# Altium PCB PCB1.PcbDoc
Units mm, origin at the board's own origin, x right, y up, seen from the top; angles counter-clockwise.
Board outline 152.4 x 101.6 mm, 2 copper layers (Top Layer, Bottom Layer); 64 components, 27 nets, 160 pads, 0 vias.
Unrouted connection lines stored in the file: 100.
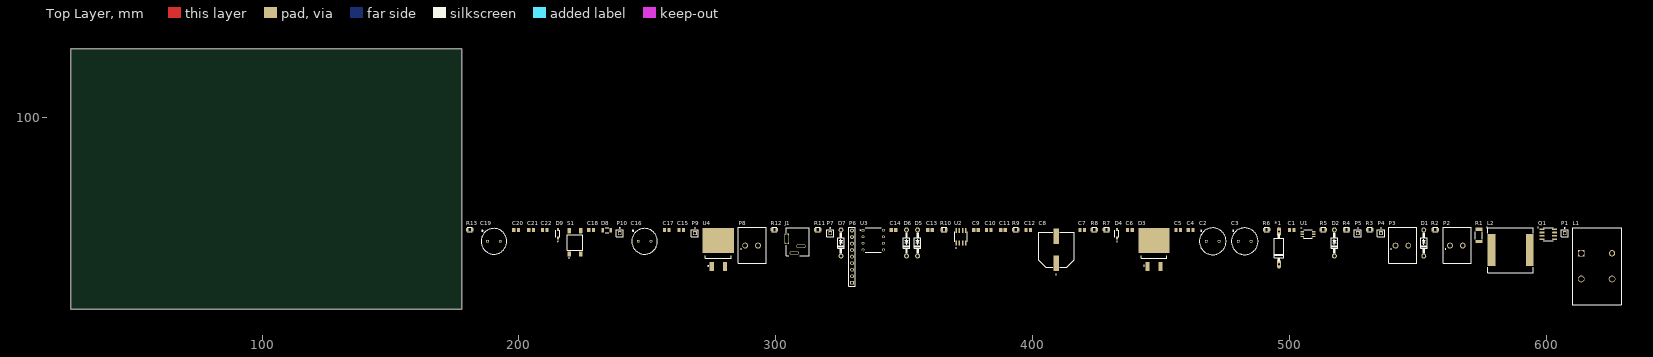
[diagram p0: Top Layer view]
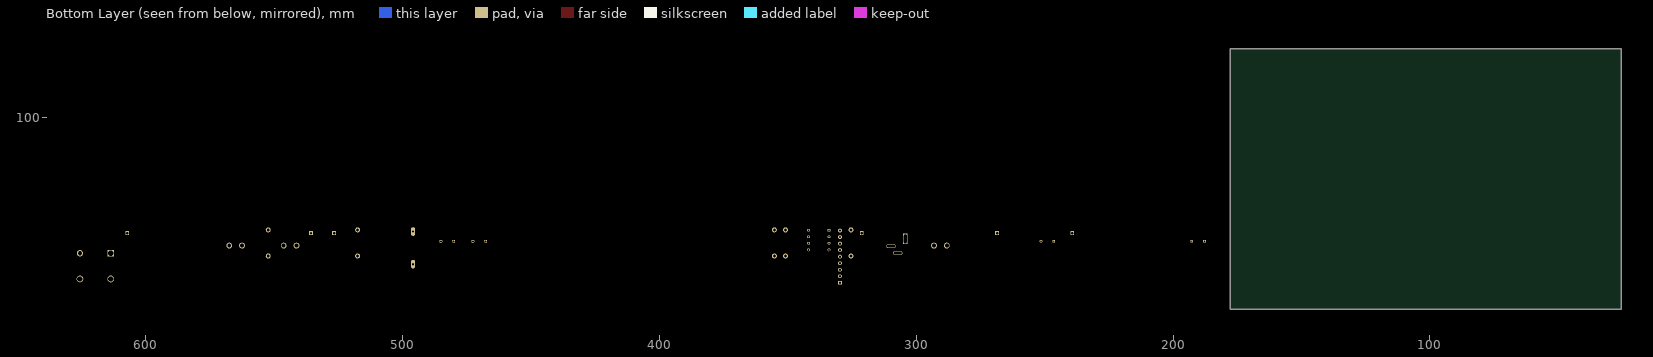
[diagram p1: Bottom Layer view, seen from below]

## Layer stack, top to bottom
Top Solder: solder mask 0.0102, Solder Resist, Dk 3.5
Top Layer: signal copper 0.0356
Dielectric 1: dielectric 0.32, FR-4, Dk 4.8
Bottom Layer: signal copper 0.0356
Bottom Solder: solder mask 0.0102, Solder Resist, Dk 3.5

## Board outline
25.4,25.4 177.8,25.4 177.8,127 25.4,127

## Design rules (kind name [scope] priority, off if disabled: settings)
Clearance [All] p1: gap=0.125 ignorepadtopadclearanceinfootprint=FALSE except(0: Arc-Hole Track-Hole SMDPad-Hole THPad-Hole Via-Hole Fill-Hole Poly-Hole Region-Hole Text-Hole)
DiffPairsRouting [All] p1: maxlimit=10 minlimit=0.125 mostfreqgap=0.15 toplayer_minwidth=0.381 toplayer_maxwidth=0.381 toplayer_prefwidth=0.381 bottomlayer_minwidth=0.381 bottomlayer_maxwidth=0.381 bottomlayer_prefwidth=0.381 maxuncoupledlength=12.7
FabricationTestPointUsage FabricationTestPointUsage_1 [All] p1: valid=0 allowmultiple=FALSE
FabricationTestpoint FabricationTestpoint_1 [All] p1: side=3 testpointundercomponent=TRUE minsize=1.016 maxsize=2.54 preferedsize=1.524 minholesize=0 maxholesize=1.016 preferedholesize=0.813 testpointgrid=0.025 allowsidetop=TRUE allowsidebottom=TRUE usegrid=TRUE gridtolerance=0
HoleSize [All] p1: absolutevalues=TRUE maxlimit=6 minlimit=0.2 maxpercent=80.000 minpercent=20.000
HoleSize FabricationTestpoint [All] p2 off: absolutevalues=TRUE maxlimit=2.54 minlimit=0.025 maxpercent=80.000 minpercent=20.000
HoleSize FabricationTestPointUsage [All] p3 off: absolutevalues=TRUE maxlimit=2.54 minlimit=0.025 maxpercent=80.000 minpercent=20.000
PlaneClearance [All] p1: clearance=0.5
PlaneConnect [All] p1: planeconnectstyle=Relief reliefexpansion=0.4 reliefentries=4 reliefconductorwidth=0.15 reliefairgap=0.15
PolygonConnect [All] p1: connectstyle=Relief reliefconductorwidth=0.15 reliefentries=4 polygonreliefangle="90 Angle" airgapwidth=0.254
RoutingCorners [All] p1: cornerstyle=45-Degree minsetback=1.25 maxsetback=1.25
RoutingVias [All] p1: holewidth=0.3 width=0.6 viastyle="Through Hole" minholewidth=0.2 minwidth=0.45 maxholewidth=0.45 maxwidth=0.75
SolderMaskExpansion [All] p1: expansion=0.075 istentingtop=FALSE
Width [All] p1: maxlimit=10 minlimit=0.125 preferedwidth=0.15
23 further rules are at their usual default settings.

## Components (designator, comment, footprint, x,y, rotation, side; value= is the part's Value field where it differs from the comment)
*1 "Diode-DO15" DO15 496.062,49.276 r90 top
C1 "Cap" C0805 500.888,56.388 r0 top value=100n
C2 "2 x UDB1H4RMPM1TD" C1-C2 470.027,51.943 r0 top value=4.7u
C3 "2 x UDB1H4RMPM1TD" C1-C2 482.473,51.943 r0 top value=4.7u
C4 "Cap" C0805 461.518,56.388 r0 top value=100n
C5 "Cap" C0805 456.692,56.388 r0 top value=100n
C6 "Cap" C0805 437.896,56.388 r0 top value=100n
C7 "Cap" C0805 419.354,56.388 r0 top value=330n
C8 "EEVFK1K101Q" C_Pol_EEV-FK1K101Q 409.067,48.641 r90 top value=100u
C9 "Cap" C0805 377.952,56.388 r0 top value=100n
C10 "Cap" C0805 382.905,56.388 r0 top value=100n
C11 "Cap" C0805 388.493,56.388 r0 top value=2n7
C12 "Cap" C0805 398.272,56.388 r0 top value=2n7
C13 "Cap" C0805 360.045,56.388 r0 top value=2n7
C14 "Cap" C0805 345.821,56.388 r0 top value=100n
C15 "Cap" C0805 263.144,56.388 r0 top value=100n
C16 "Cap Pol2" C_ECA2CHG100 248.793,52.07 r0 top value=10u
C17 "1u" C0805 257.556,56.388 r0 top
C18 "Cap" C0805 228.092,56.388 r0 top value=100n
C19 "Cap Pol2" C_ECA2CHG100 190.119,52.07 r0 top value=10u
C20 "Cap" C0805 198.882,56.388 r0 top value=1n
C21 "Cap" C0805 204.724,56.388 r0 top value=100n
C22 "Cap" C0805 210.058,56.388 r0 top value=100n
D1 "Diode 1N4004" diode_1N4004 552.323,51.308 r90 top
D2 "Diode 1N4004" diode_1N4004 517.525,51.308 r90 top
D3 "STPS30L60C" Diode_Scho 447.294,51.435 r90 top
D4 "BZX584C15G3-08" diode_zener 432.689,54.864 r90 top
D5 "Diode 1N4004" diode_1N4004 355.219,51.308 r90 top
D6 "Diode 1N4004" diode_1N4004 350.901,51.308 r90 top
D7 "Diode 1N4004" diode_1N4004 325.374,51.308 r90 top
D8 "KPTL-3216SURCK-01" LED 234.188,56.261 r0 top
D9 "BZX584C15G3-08" diode_zener 215.011,54.864 r90 top
J1 "PJ-006A" CUI_Inc_PJ-006A_MFG 308.61,51.816 r0 top
L1 "EMI_Choke" EMI_Choke 619.633,42.291 r0 top
L2 "SRP1770TA-220M" SRP1770TA-220M 586.105,48.641 r0 top value=22uH
P1 "Plug" PIN1 607.187,55.118 r0 top
P2 "Block_2Position" Block_2Position 565.15,50.419 r0 top
P3 "Block_2Position" Block_2Position 543.941,50.419 r0 top
P4 "Plug" PIN1 535.686,55.118 r0 top
P5 "Plug" PIN1 526.669,55.118 r0 top
P6 "Header 9" HDR1X9 329.692,35.814 r90 top
P7 "Plug" PIN1 321.183,55.118 r0 top
P8 "Block_2Position" Block_2Position 290.703,50.419 r0 top
P9 "Plug" PIN1 268.478,55.118 r0 top
P10 "Plug" PIN1 239.268,55.118 r0 top
Q1 "SIR120DP-T1-RE3" MOFET_SIR120DP-T1-RE3 600.583,54.864 r0 top
R1 "WSL20106L000FEA18" R0.006 573.786,54.229 r90 top value=0.006
R2 "Res1" R0805 556.768,56.515 r0 top value=1k
R3 "Res1" R0805 531.241,56.515 r0 top value=100k
R4 "Res1" R0805 522.224,56.515 r0 top value=100k
R5 "Res1" R0805 513.207,56.515 r0 top value=100k
R6 "Res1" R0805 491.109,56.515 r0 top value=10
R7 "Res1" R0805 428.752,56.515 r0 top value=100k
R8 "Res1" R0805 424.053,56.515 r0 top value=6k2
R9 "Res1" R0805 393.446,56.515 r0 top value=5k1
R10 "Res1" R0805 365.506,56.515 r0 top value=6k2
R11 "Res1" R0805 316.357,56.515 r0 top value=100k
R12 "Res1" R0805 299.466,56.515 r0 top value=1k
R13 "Res1" R0805 180.848,56.515 r0 top value=1k
S1 "4-1437565-1" Switch 221.615,51.435 r90 top
U1 "LTC6101AIMS8PBF" LTC6101AIMS8#PBF 507.111,55.118 r0 top
U2 "IR7184STRPBF" IR7184STRPBF 372.11,53.594 r90 top
U3 "LM555CN/NOPB" LM555CN/NOPB 337.947,52.705 r0 top
U4 "L7805CD2T-TR" Volt_Reg 277.622,52.324 r90 top

## Footprints (in the part's own frame and the unit in brackets; to place one, negate y for a bottom-side part, rotate by r counter-clockwise, add the part's x,y. Pads: shape width x height; smd on the part's side, far side on the other; paste and mask are expansions set on the pad)
Block_2Position [mm]
  round 2.25 hole 1.5: 1(-2.627,-0.127) 2(2.373,-0.127)
  silkscreen extent -5.23,-7 5.57,7
C1-C2 [mm]
  round 1.208 hole 0.8: NEG(-2.373,0) POS(2.627,0)
  silkscreen extent -5.07,-5.2 5.33,5.2
C0805 [mm]
  rect 1.24x1.56 smd: 1(-0.885,0) 2(0.885,0)
C_ECA2CHG100 [mm]
  rect 1.108x1.108 hole 0.6: NEG(-2.373,-0.127)
  round 1.108 hole 0.6: POS(2.627,-0.127)
  silkscreen extent -4.87,-5.13 5.13,4.87
C_Pol_EEV-FK1K101Q [mm]
  rect 6.06x2.21 smd: 1(-5.225,-0.127) 2(5.225,-0.127)
  silkscreen extent -9.7,-6.98 6.85,6.73
CUI_Inc_PJ-006A_MFG [mm]
  rect 1.6x4.1 hole 3.5 slot 1 at 0 deg paste-1000 mask+0: 1(-4.35,1.05)
  rrect100% 3.6x1.6 hole 1 slot 3 at 0 deg paste-1000 mask+0: 2(-1.4,-4.45) 3(1.2,-1.75)
  silkscreen extent -4.5,-5.5 4.5,5.5, body extent -5.25,-5.6 4.6,5.6, height 0.25
diode_1N4004 [mil]
  round 76 hole 44: A(200,0) C(-200,0)
  silkscreen extent -155,-50 155,50
Diode_Scho [mm]
  rect 3.5x1.6 smd: 1(-9.367,2.54) 3(-9.367,-2.54)
  rect 9.75x12.2 smd paste-7: 4(0.908,0)
  silkscreen extent -9.14,-5 -5.18,5
diode_zener [mm]
  rrect25% 1.25x0.74 smd: A(1.66,-0.127) C(-1.66,-0.127)
  silkscreen extent -3.01,-0.9 1.35,0.65
DO15 [mil]
  oval 132x66 hole 35.43: A(255,5) C(-245,5)
  silkscreen extent -201,-65 210,75
EMI_Choke [mm]
  round 2.6 hole 2.1: 1(-6,-5) 2(6,-5)
  round 2.43 hole 1.62: 3(6,5)
  rect 2.6x2.6 hole 2.1: 4(-6,5)
  silkscreen extent -9.53,-15.11 9.65,14.99
HDR1X9 [mm] "Connector; Header; 9 Position"
  rect 1.5x1.5 hole 0.9: 1(0,0)
  round 1.5 hole 0.9: 2(2.54,0) 3(5.08,0) 4(7.62,0) 5(10.16,0) 6(12.7,0) 7(15.24,0) 8(17.78,0) 9(20.32,0)
  silkscreen extent -1.27,-1.27 21.59,1.27
IR7184STRPBF [mm]
  rrect15% 1.97x0.6 smd: 1(-2.348,1.905) 2(-2.348,0.635) 3(-2.348,-0.635) 4(-2.348,-1.905) 5(2.602,-1.905) 6(2.602,-0.635) 7(2.602,0.635) 8(2.602,1.905)
  silkscreen extent -4.27,-2.5 2.13,2.5
LED [mm]
  rect 1.06x1.82 smd: 1(-1.528,0) 2(1.528,0)
  silkscreen extent -0.68,-0.9 0.68,0.9
LM555CN/NOPB [mm]
  rect 1.13x1.13 hole 0.74: 1(-3.97,3.556)
  round 1.13 hole 0.74: 2(-3.97,1.016) 3(-3.97,-1.524) 4(-3.97,-4.064) 5(3.97,-4.064) 6(3.97,-1.524) 7(3.97,1.016) 8(3.97,3.556)
  silkscreen extent -5.13,-5.05 3.17,4.54
LTC6101AIMS8#PBF [mil]
  rect 55x17 smd: 1(-83.25,27.88) 2(-83.25,2.29) 3(-83.25,-23.3) 4(-83.25,-48.89) 5(90.75,-48.89) 6(90.75,-23.3) 7(90.75,2.29) 8(90.75,27.88)
  silkscreen extent -62,-77 70,55, body extent -55,-107 63,86, height 17
MOFET_SIR120DP-T1-RE3 [mm]
  rrect25% 1.9x0.6 smd: 1(-2.201,1.778) 2(-2.201,0.508) 3(-2.201,-0.762) 4(-2.201,-2.032) 5(2.709,-2.032) 6(2.709,-0.762) 7(2.709,0.508) 8(2.709,1.778)
  silkscreen extent -3.85,-2.65 2.2,2.47
PIN1 [mm] "Connector; Plug"
  rect 1.5x1.5 hole 0.9: 1(0,0)
  silkscreen extent -1.4,-1.4 1.4,2.17
R0.006 [mm]
  rect 1.21x2.81 smd: 1(-2.416,0) 2(2.416,0)
  silkscreen extent -1.49,-1.4 1.49,1.4
R0805 [mm]
  rrect25% 1x1.42 smd: 1(-0.935,0) 2(0.935,0)
  silkscreen extent -1,-0.89 1,0.89
SRP1770TA-220M [mm]
  rect 3x12.45 smd: 1(-7.445,-0.127) 2(7.445,-0.127)
  silkscreen extent -9.25,-8.93 8.8,8.72, body extent -8.65,-8.78 8.65,8.52, height 7
Switch [mm]
  rrect15% 2.1x1.38 smd: 1(-4.423,2.113) 2(4.677,2.113) 3(-4.423,-2.367) 4(4.677,-2.367)
  silkscreen extent -6.12,-3.13 3.13,2.87
Volt_Reg [mm]
  rect 3.5x1.6 smd: 1(-10.256,2.54) 3(-10.256,-2.54)
  rect 9.75x12.2 smd paste-7: 4(0.019,0)
  silkscreen extent -10.03,-5 -6.07,5

## Part data
*1: "P6KE43CA", Ref=P6KE43CA, Tension=43V
C1 C4 C5 C6 C9 C10 C14 C15 C18 C21 C22: "Capacitor", LatestRevisionDate=17-Jul-2002, LatestRevisionNote="Re-released for DXP Platform.", PackageDescription="Radial Cap, Thru-Hole; 2 Leads; 0.3 in Pin Spacing", PackageReference=RAD-0.3, Published=8-Jun-2000, Publisher="Altium Limited", Supplier 1=Mouser
C2 C3: library part "Cap Pol2", LatestRevisionDate=17-Jul-2002, LatestRevisionNote="Re-released for DXP Platform.", PackageDescription="Polarized Capacitor; 2 Leads", PackageReference=POLAR0.8, Published=8-Jun-2000, Publisher="Altium Limited", Supplier 1=Digi-Key
C7: library part Cap_2, "Capacitor", LatestRevisionDate=17-Jul-2002, LatestRevisionNote="Re-released for DXP Platform.", PackageDescription="Radial Cap, Thru-Hole; 2 Leads; 0.3 in Pin Spacing", PackageReference=RAD-0.3, Published=8-Jun-2000, Publisher="Altium Limited", Supplier 1=Mouser
C8: library part "Cap Pol2_1", "Polarized Capacitor (Axial)", LatestRevisionDate=17-Jul-2002, LatestRevisionNote="Re-released for DXP Platform.", PackageDescription="Polarized Capacitor; 2 Leads", PackageReference=POLAR0.8, Published=8-Jun-2000, Publisher="Altium Limited", Supplier 1=Mouser
C11 C12 C13: library part Cap_1, "Capacitor", LatestRevisionDate=17-Jul-2002, LatestRevisionNote="Re-released for DXP Platform.", PackageDescription="Radial Cap, Thru-Hole; 2 Leads; 0.3 in Pin Spacing", PackageReference=RAD-0.3, Published=8-Jun-2000, Publisher="Altium Limited", Supplier 1=Mouser
C16 C19: library part "Cap Pol2_2", "Polarized Capacitor (Axial)", LatestRevisionDate=17-Jul-2002, LatestRevisionNote="Re-released for DXP Platform.", PackageDescription="Polarized Capacitor; 2 Leads", PackageReference=POLAR0.8, Published=8-Jun-2000, Publisher="Altium Limited", Supplier 1=Mouser
C17: library part C_4, Valeur=1u
C20: library part Cap_3, "Capacitor", LatestRevisionDate=17-Jul-2002, LatestRevisionNote="Re-released for DXP Platform.", PackageDescription="Radial Cap, Thru-Hole; 2 Leads; 0.3 in Pin Spacing", PackageReference=RAD-0.3, Published=8-Jun-2000, Publisher="Altium Limited", Supplier 1=Mouser
D1 D2 D5 D6 D7: "1 Amp General Purpose Rectifier", Code_JEDEC=DO-204-AL, ComponentLink1Description="Manufacturer Link", ComponentLink1URL=http://www.fairchildsemi.com/, ComponentLink2Description=Datasheet, ComponentLink2URL=http://www.fairchildsemi.com/ds/1N%2F1N4001.pdf, DatasheetVersion=1998, LatestRevisionDate=17-Jul-2002, LatestRevisionNote="Re-released for DXP Platform.", PackageDescription="Diode, Axial; Body 5.2 x 2.7 mm (LxDia. max), Lead Dia. 0.86 mm (max)", PackageReference=DO-41, PackageVersion=Aug-1999, Published=8-Jun-2000, Publisher="Altium Limited", Supplier 1=Digi-Key
D3: library part "D Schottky", "Schottky Diode", Code_JEDEC=DO-214-AA, LatestRevisionDate=17-Jul-2002, LatestRevisionNote="Re-released for DXP Platform.", PackageDescription="DO-214-AA/SMB; 2 C-Bend Leads; Body 5.3 x 3.6 mm, inc. leads (LxW)", PackageReference=SMB, Published=8-Jun-2000, Publisher="Altium Limited"
D4 D9: library part "D Zener", "Zener Diode 15V", LatestRevisionDate=17-Jul-2002, LatestRevisionNote="Re-released for DXP Platform.", PackageDescription="Diode, Thru-Hole; 2 Leads; 0.7 in Pin Spacing", PackageReference=DIODE-0.7, Published=8-Jun-2000, Publisher="Altium Limited", Supplier 1=Mouser
D8: library part LED2, "Typical RED, GREEN, YELLOW, AMBER GaAs LED", LatestRevisionDate=17-Jul-2002, LatestRevisionNote="Re-released for DXP Platform.", PackageDescription="SM LED; 2 Flat Leads", PackageReference=3.2X1.6X1.1, PackageVersion=Feb-2002, Published=8-Jun-2000, Publisher="Altium Limited", Supplier 1=Farnell
J1: "2.1mm DC Power Jack"
L1: "1mH 20A"
P6: "Header, 9-Pin", LatestRevisionDate=17-Jul-2002, LatestRevisionNote="Re-released for DXP Platform.", Publisher="Altium Limited"
R1: library part Res1_2, "Resistor", LatestRevisionDate=17-Jul-2002, LatestRevisionNote="Re-released for DXP Platform.", PackageDescription="Axial Device, Thru-Hole; 2 Leads; 0.3 in Pin Spacing", PackageReference=AXIAL-0.3, Published=8-Jun-2000, Publisher="Altium Limited", Supplier 1=Mouser
R2 R12 R13: library part Res1_6, "Resistor", LatestRevisionDate=17-Jul-2002, LatestRevisionNote="Re-released for DXP Platform.", PackageDescription="Axial Device, Thru-Hole; 2 Leads; 0.3 in Pin Spacing", PackageReference=AXIAL-0.3, Published=8-Jun-2000, Publisher="Altium Limited", Supplier 1=Mouser
R3 R4 R5 R7 R11: "Resistor", LatestRevisionDate=17-Jul-2002, LatestRevisionNote="Re-released for DXP Platform.", PackageDescription="Axial Device, Thru-Hole; 2 Leads; 0.3 in Pin Spacing", PackageReference=AXIAL-0.3, Published=8-Jun-2000, Publisher="Altium Limited", Supplier 1=Digi-Key, Supplier 2=Mouser
R6: library part Res1_5, "Resistor", LatestRevisionDate=17-Jul-2002, LatestRevisionNote="Re-released for DXP Platform.", PackageDescription="Axial Device, Thru-Hole; 2 Leads; 0.3 in Pin Spacing", PackageReference=AXIAL-0.3, Published=8-Jun-2000, Publisher="Altium Limited", Supplier 1=Mouser
R8 R10: library part Res1_1, "Resistor", LatestRevisionDate=17-Jul-2002, LatestRevisionNote="Re-released for DXP Platform.", PackageDescription="Axial Device, Thru-Hole; 2 Leads; 0.3 in Pin Spacing", PackageReference=AXIAL-0.3, Published=8-Jun-2000, Publisher="Altium Limited", Supplier 1=Mouser
R9: library part Res1_4, "Resistor", LatestRevisionDate=17-Jul-2002, LatestRevisionNote="Re-released for DXP Platform.", PackageDescription="Axial Device, Thru-Hole; 2 Leads; 0.3 in Pin Spacing", PackageReference=AXIAL-0.3, Published=8-Jun-2000, Publisher="Altium Limited", Supplier 1=Mouser
S1: library part SW-PB, "Switch", LatestRevisionDate=17-Jul-2002, LatestRevisionNote="Re-released for DXP Platform.", PackageDescription="Switch; 2 Leads", PackageReference=SPST-2, Published=24-Mar-1999, Publisher="Altium Limited", Supplier 1=Mouser
U1: "SP Amp Current Sense Amp Single 60V Automotive 8-Pin MSOP Tube", Package="MSOP-8 Analog Devices", Availability=Warning, Check_prices=https://www.snapeda.com/parts/LTC6101AIMS8%23PBF/Analog%20Devices/view-part/4331140/?ref=eda, MF="Analog Devices", MP=LTC6101AIMS8#PBF, Price=None, Purchase-URL=https://pricing.snapeda.com/search/part/LTC6101AIMS8#PBF/?ref=eda, SnapEDA_Link=https://www.snapeda.com/parts/LTC6101AIMS8%23PBF/Analog%20Devices/view-part/4331140/?ref=snap, Supplier 1=Mouser
U2: "Drives IGBT/MOSFET power devices", Package="SOIC-8 Infineon", Supplier Part Number 1=942-IR7184STRPBF, Availability=Unavailable, MF="Infineon Technologies", MP=IR7184STRPBF, Price=None, SnapEDA_Link=https://www.snapeda.com/parts/IR7184STRPBF/Infineon%20Technologies/view-part/1224754/?ref=snap, Supplier 1=Mouser
U3: Package=None, Availability=Unavailable, MP=LM555CN/NOPB, Price=None, Supplier 1=Mouser
U4: library part "Volt Reg", "Voltage Regulator", LatestRevisionDate=29-May-2009, LatestRevisionNote="IPC-7351 Footprint Added.", PackageDescription="3-Pin Transistor Outline Package 2.54 mm Pitch, 15.1 mm Lead Span", PackageReference=D2PAK, Published=24-Mar-1999, Publisher="Altium Limited", Supplier 1=Mouser
P1 P4 P5 P7 P9 P10: LatestRevisionDate=17-Jul-2002, LatestRevisionNote="Re-released for DXP Platform.", Publisher="Altium Limited"

## Nets (pads, with @x,y where several pads share a name; then routed paths per layer and width w, separated by ;. In a path a pad name is that pad's centre, name@x,y a point inside that pad or via, vN(x,y) a via of type N, cw(c..) or ccw(c..) an arc to the next point about the centre after c; other vN are vias at no path point)
+5V: C15.2 C17.1 P6.1 U4.3
+12V: C1.2 C18.2 P8.2 U2.5 U4.1
BUCK_OUT: *1.C P3.1 P4.1 R1.1 R4.2 U1.8
GND: *1.A C1.1 C4.1 C5.1 C6.1 C8.2 C9.1 C10.1 C11.1 C12.1 C13.1 C15.1 C17.2 C18.1 D3.1 D8.2 J1.2 J1.3 L1.3 P3.2 P6.5 P6.9 P8.1 P9.1 P10.1 R8.1 R9.1 R10.1 R13.2 S1.1 U1.5 U2.2 U2.3
INPUT: C8.1 C9.2 C10.2 L1.4 P1.1 Q1.5 Q1.6 Q1.7 Q1.8 R2.1 R7.2
Iout_mon: C11.2 P6.3 P7.1 R9.2 U1.4
LED: P6.6 R12.1
NetC14_1: C14.1 R11.2 U3.3
NetC14_2: C14.2
NetC19_2: C20.1 C21.1 C22.1 R13.1 U3.1
NetC20_2: C20.2 R11.1 U3.2 U3.6
NetC21_2: C21.2 U3.5
NetD1_1: R2.2
NetD8_1: D8.1 R12.2
NetL1_2: L1.2 P2.1
NetL2_2: L2.2 R1.2 R5.2
NetQ1_4: Q1.4 R3.2 R6.2
NetR5_1: R5.1 U1.1
NetR6_1: R6.1 U2.7
OUTPUT: C4.2 C5.2 C6.2 L2.1 U1.7
PV_IN: L1.1 P2.2
PWM: P6.8 U2.1
SW: P6.7 S1.2
SWITCH_node: C7.1 C22.2 P5.1 Q1.1 Q1.2 Q1.3 R3.1 U2.6 U3.4 U3.8
V_BOOT: C7.2 U2.8
Vin_mon: C13.2 P6.2 R7.1 R10.2
Vout_mon: C12.2 P6.4 R4.1 R8.2
pads on no net: C2.NEG C2.POS C3.NEG C3.POS C16.NEG C16.POS C19.NEG C19.POS D1.A D1.C D2.A D2.C D3.3 D3.4 D4.A D4.C D5.A D5.C D6.A D6.C D7.A D7.C D9.A D9.C J1.1 S1.3 S1.4 U1.2 U1.3 U1.6 U2.4 U3.7 U4.4

## Text inside footprints (layer, text, board x,y; h text height)
U1: Top Overlay "*" at 504.158,56.121 h1.27; Mechanical 13 "*" at 505.454,55.054 h1.27